# EAGLE board rev_B (EAGLE 9.2.2)
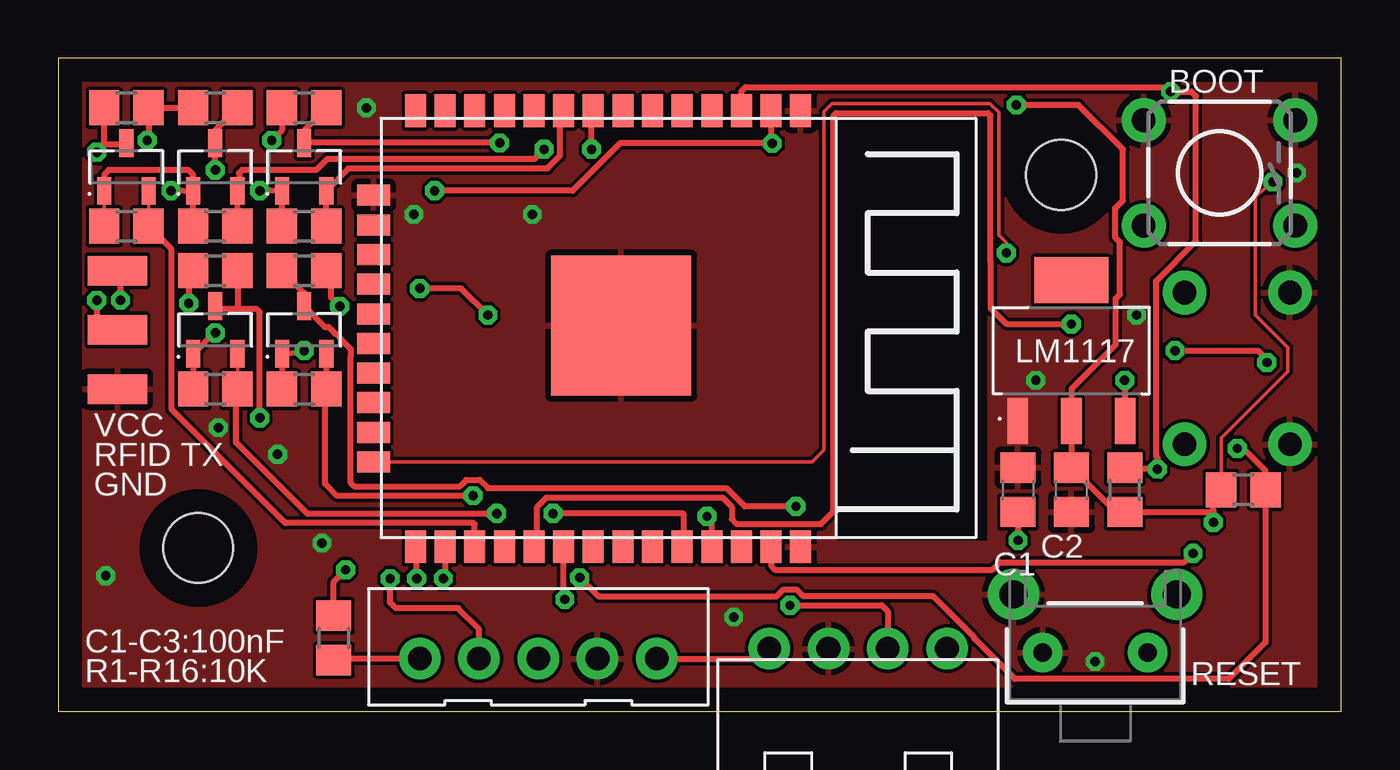
[diagram p0: board, top side]
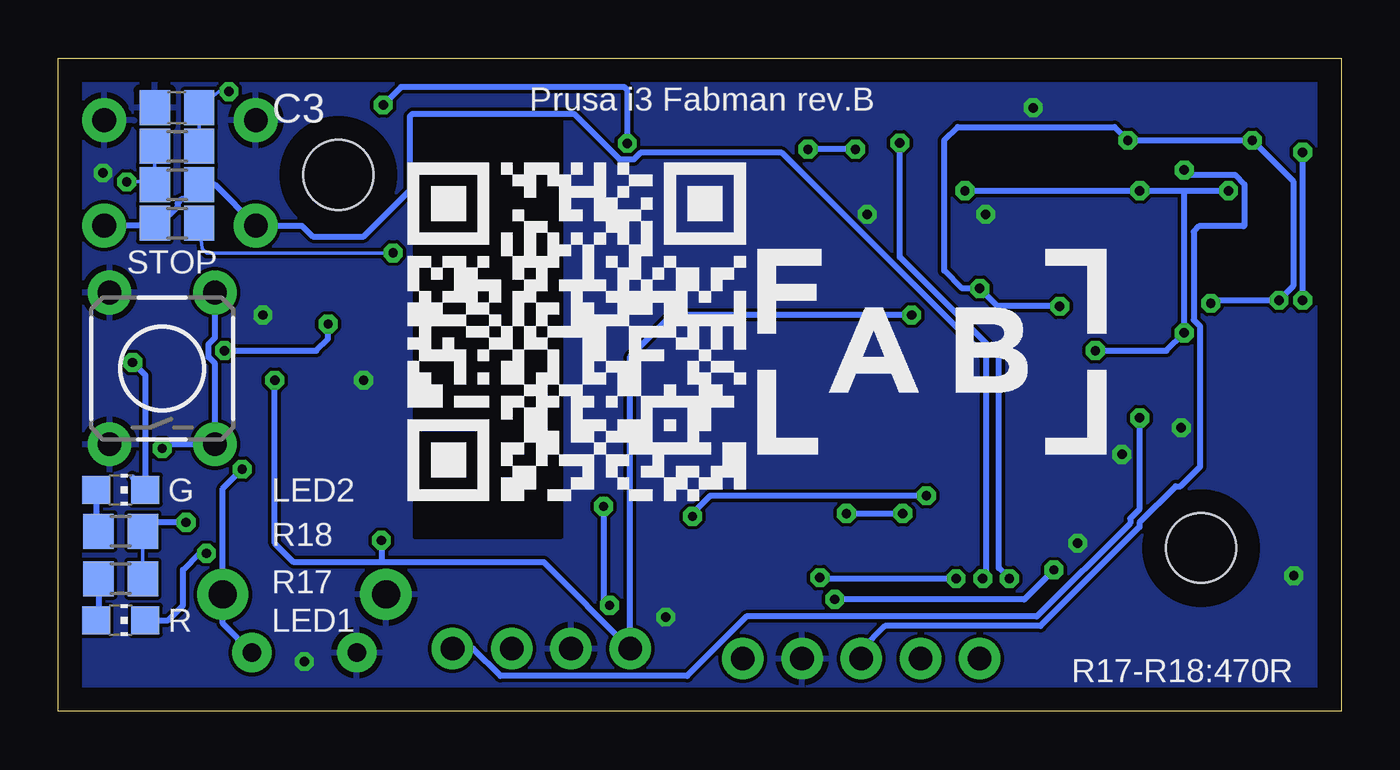
[diagram p1: board, bottom side, seen from below]

Size 55 x 28 mm. Coordinates in mm from the lower left corner, seen from the top.
Outline: 0,0 55,0 55,28 0,28 0,0
Copper layers (1*16): Top 0.035mm / dielectric 1.5mm / Bottom 0.035mm
Design rules "default": minimum track width 6mil, minimum drill 0.35mm, track to track 6mil, track to pad 6mil, pad to pad 6mil, via to via 6mil, smd to smd 6mil, copper to edge 40mil, drill to drill 6mil, minimum pad ring 10mil, minimum via ring 8mil, stop-mask expansion 4mil, vias tented up to drill 0mil, thermal gap 10mil
Holes 3 mm at 43,23 6,7

## Footprints (pad centres in the part's own frame; a part is rotated, then mirrored left to right if it is on the bottom)
TACTILE_SWICTH_THT = drill 1.016 pad 1.88: 1 -3.251,2.261; 2 3.251,2.261; 3 -3.251,-2.261; 4 3.251,-2.261
C0805 = smd 1.3 x 1.5: 1 -0.95,0; 2 0.95,0
HEADER_1X4_RIGHT_ANGLE = drill 1.016 pad 1.778: 1 -3.81,0; 2 -1.27,0; 3 1.27,0; 4 3.81,0
HEADER_1X5 = drill 1.016 pad 1.778: 1 -5.08,0; 2 -2.54,0; 3 0,0; 4 2.54,0; 5 5.08,0
CHIP-LED0805 = smd 1.2 x 1.2: A 0,-1.05; C 0,1.05
SOT229P700X180-4 = smd 1.965 x 0.889: 1 -3.023,2.3; 2 -3.023,0; 3 -3.023,-2.3 | smd 1.965 x 3.189: 4 3.023,0
SMD_PAD_1.27X2.54MM = smd 1.27 x 2.54: 1 0,0
SOT95P240X110-3 = smd 1.18 x 0.609: 1 -1.024,0.95; 2 -1.024,-0.95; 3 1.024,0
R0805 = smd 1.3 x 1.5: 1 -0.95,0; 2 0.95,0
TACTILE_SWITCH_RIGHT_ANGLE_THT = drill 0.8 pad 1.7: 1 2.25,0; 2 -2.25,0 | drill 1.2 pad 2.2: ANCHOR1 3.5,-2.5; ANCHOR2 -3.5,-2.5
ESP32_MODULE = smd 6 x 6: 0 0.026,-0.121 | smd 1.4 x 0.9: 1 -9.194,7.569; 2 -9.194,6.298; 3 -9.194,5.029; 4 -9.194,3.759; 5 -9.194,2.489; 6 -9.194,1.218; 7 -9.194,-0.051; 8 -9.194,-1.321; 9 -9.194,-2.591; 10 -9.194,-3.861; 11 -9.194,-5.131; 12 -9.194,-6.402; 13 -9.194,-7.671; 14 -9.194,-8.941; 25 9.507,-8.941; 26 9.507,-7.671; 27 9.507,-6.402; 28 9.507,-5.131; 29 9.507,-3.861; 30 9.507,-2.591; 31 9.507,-1.321; 32 9.507,-0.051; 33 9.507,1.218; 34 9.507,2.489; 35 9.507,3.759; 36 9.507,5.029; 37 9.507,6.298; 38 9.507,7.569 | smd 0.9 x 1.4: 15 -5.564,-10.742; 16 -4.293,-10.742; 17 -3.023,-10.742; 18 -1.754,-10.742; 19 -0.483,-10.742; 20 0.786,-10.742; 21 2.057,-10.742; 22 3.326,-10.742; 23 4.596,-10.742; 24 5.867,-10.742

## Placement (x,y rotation side)
BOOT  TACTILE_SWITCH_THT_  [TACTILE_SWICTH_THT]  49.78,23.08 180 top
C1  100nF  [C0805]  41.15,9.49 90 top
C2  100nF  [C0805]  43.43,9.49 270 top
C3  100nF  [C0805]  49.91,25.88 180 bottom
CN1  HEADER_1X4"  [HEADER_1X4_RIGHT_ANGLE]  34.29,2.68 0 top
CN2  HEADER_1X5  [HEADER_1X5]  20.57,2.25 180 top
LED1  RED  [CHIP-LED0805]  52.32,3.9 270 bottom
LED2  GREEN  [CHIP-LED0805]  52.32,9.49 270 bottom
LM1117  LM1117_  [SOT229P700X180-4]  43.43,15.46 90 top
PAD1  SMD_PAD_1.27X2.54MM  [SMD_PAD_1.27X2.54MM]  2.54,18.89 90 top
PAD2  SMD_PAD_1.27X2.54MM  [SMD_PAD_1.27X2.54MM]  2.54,13.81 90 top
PAD3  SMD_PAD_1.27X2.54MM  [SMD_PAD_1.27X2.54MM]  2.54,16.35 90 top
Q1  BSS138  [SOT95P240X110-3]  10.54,16.35 90 top
Q2  BSS138  [SOT95P240X110-3]  6.73,16.35 90 top
Q3  BSS138  [SOT95P240X110-3]  6.73,23.34 90 top
Q4  BSS138  [SOT95P240X110-3]  10.54,23.34 90 top
Q5  BSS138  [SOT95P240X110-3]  2.92,23.34 90 top
R1  10K  [R0805]  45.72,9.49 90 top
R2  10K  [R0805]  50.8,9.49 180 top
R3  10K  [R0805]  10.54,18.89 180 top
R4  10K  [R0805]  10.54,13.81 0 top
R5  10K  [R0805]  6.73,18.89 0 top
R6  10K  [R0805]  6.73,13.81 0 top
R7  10K  [R0805]  6.73,25.88 0 top
R8  10K  [R0805]  6.73,20.8 0 top
R9  10K  [R0805]  10.54,25.88 0 top
R10  10K  [R0805]  10.54,20.8 0 top
R11  10K  [R0805]  2.92,25.88 180 top
R12  10K  [R0805]  2.92,20.8 0 top
R13  10K  [R0805]  11.81,3.14 270 top
R14  10K  [R0805]  49.91,22.57 180 bottom
R15  10K  [R0805]  49.91,20.92 0 bottom
R16  10K  [R0805]  49.91,24.23 180 bottom
R17  470R  [R0805]  52.32,5.68 180 bottom
R18  470R  [R0805]  52.32,7.71 180 bottom
RESET  TACTILE_SWITCH_RIGHT_ANGLE_THT"  [TACTILE_SWITCH_RIGHT_ANGLE_THT]  44.45,2.51 180 top
STOP_BUTTON  TACTILE_SWITCH_LONG_THT_  [TACTILE_SWICTH_THT]  50.55,14.7 90 bottom
U$1  ESP32_MODULE"  [ESP32_MODULE]  24.26,16.56 270 top

## Library data of the parts
BOOT CN1 CN2 LM1117 PAD1-PAD3 Q1-Q5 RESET STOP_BUTTON U$1 = dronecz
C1-C3 = rcl; SPICEPREFIX: C
LED1 LED2 = led
R1-R18 = rcl; SPICEPREFIX: R

## Nets
3V3: C2.1 LM1117.2 Q1.1 Q2.1 Q3.1 Q4.1 Q5.1 R1.1 R2.2 R4.1 R6.1 R8.1 R10.1 R12.1 R14.2 R16.2 R17.1 R18.1 U$1.2
EN: C3.1 R1.2 R16.1 RESET.2 RESET.ANCHOR2 U$1.3
GND: BOOT.3 BOOT.4 C1.2 C2.2 C3.2 CN1.2 CN2.2 LM1117.1 PAD2.1 RESET.1 RESET.ANCHOR1 STOP_BUTTON.1 STOP_BUTTON.2 U$1.0 U$1.1 U$1.15 U$1.38
IO0: BOOT.1 BOOT.2 R14.1 R15.1 U$1.25
IO2: R15.2 U$1.24
IO4: R2.1 STOP_BUTTON.3 STOP_BUTTON.4 U$1.26
IO5: LED2.C U$1.29
IO22: U$1.36
IO23: LED1.C U$1.37
N$2: U$1.28
N$3: LED1.A R17.2
N$4: LED2.A R18.2
N$5: R13.1 U$1.30
PRINTER_RESET: CN2.5 R13.2
RFID_: Q5.2 R12.2 U$1.27
RFID_TX: PAD3.1 Q5.3 R11.2
RXD: CN1.3 Q1.3 R3.2
RXD3: Q3.2 R8.2 U$1.8
RXD_PC: Q1.2 R4.2 U$1.35
RXD_PRINTER: CN2.3 Q3.3 R7.2
TXD: CN1.4 Q2.3 R5.2
TXD3: Q4.2 R10.2 U$1.9
TXD_PC: Q2.2 R6.2 U$1.34
TXD_PRINTER: CN2.4 Q4.3 R9.2
VCC: C1.1 CN1.1 CN2.1 LM1117.3 PAD1.1 R3.1 R5.1 R7.1 R9.1 R11.1

## Tracks (layer width: path | path; a pad name or v marks a point on that pad's centre or on a via)
3V3  (via drill 0.4)
  Top 0.152: Q5.1 R12.1 | v52.07,22.7 51.31,22.07 51.31,16.99 52.7,15.59 52.7,14.57 49.85,11.72 R2.2
  Top 0.254: R10.1 Q4.1 8.65,22.34 v8.64,22.32 | R8.1 Q3.1 | R6.1 Q2.1 6.65,16.22 v6.73,16.22 | R4.1 Q1.1 10.43,15.35 v10.54,15.46 | 48.64,8.54 R1.1 45.33,8.54 C2.1 LM1117.2 43.43,13.81 45.34,15.72 45.34,17.7 45.51,17.87 45.51,20.12 45.31,20.32 45.31,21.58 45.64,21.91 45.64,24.09 43.74,26 v41.07,26 | 48.63,8.54 48.64,8.54 | U$1.2 30.55,24.4 v30.61,24.35 24.08,24.35 22.05,22.32 v16.13,22.32 | Q5.1 1.97,23.02 2.16,23.21 5.59,23.21 5.78,23.02 Q3.1 | v4.83,22.32 4.97,22.34 Q3.1 | v49.52,8.1 49.52,8.6 | 49.52,8.6 49.52,9.16 R2.2 | 49.52,8.6 49.46,8.54 48.64,8.54
  Bottom 0.152: R17.1 R18.1 | R16.2 R14.2 50.86,22.7 v52.07,22.7
  Bottom 0.254: v30.61,24.35 30.61,26.64 30.73,26.77 40.31,26.77 v41.07,26 | 6.73,22.32 v8.64,22.32 v16.13,22.32 | 6.73,22.32 v4.83,22.32 | 6.73,22.32 v6.73,16.22 7.49,15.46 v10.54,15.46 | v49.52,8.1 50.99,8.1 R18.1
EN  (via drill 0.4)
  Top 0.254: R1.2 45.78,10.38 v47.12,10.38 47.12,10.89 47.07,10.94 47.07,18.46 48.77,20.16 48.77,26.38 48.58,26.57 v47.69,26.57 47.5,26.77 29.46,26.77 29.29,26.59 U$1.3
  Bottom 0.152: v47.69,26.57 48.14,26.57 C3.1 R16.1
  Bottom 0.254: RESET.2 47.95,3.76 RESET.ANCHOR2 47.95,9.55 v47.12,10.38
GND  (via drill 0.4)
  other vias: 15.24,21.3 2.03,5.81 28.96,4.03 44.45,2.13 41.91,14.19 46.23,16.99 53.09,23.08 20.32,21.3 13.21,25.88 9.4,11.02 11.3,7.21 6.86,12.16
  pour Bottom: 0,28.16 -0.13,-0.03 54.99,-0.03 55.12,28.16
  pour Top: -0.13,28.16 -0.13,-0.03 55.12,-0.03 55.12,28.16
IO0  (via drill 0.4)
  Top 0.254: v15.37,5.68 15.37,7 U$1.25
  Bottom 0.254: v15.37,5.68 15.24,5.94 15.24,15.21 23.98,23.95 30.05,23.95 30.32,23.67 30.94,23.67 32.89,25.62 33.35,25.62 33.36,25.62 39.81,25.62 39.92,25.51 39.92,22.34 41.91,20.36 44.09,20.36 44.56,20.82 BOOT.2 48.28,22.57 R14.1 49.58,21.95 49.73,21.95 49.89,21.79 49.89,21.64 50.61,20.92 R15.1 50.96,20.82 BOOT.1
IO2  (via drill 0.4)
  Top 0.152: U$1.24 32.31,10.69 32.83,11.21 32.83,25.71 33.18,26.06 39.95,26.06 40.32,25.69 40.32,20.41 40.65,20.09 v40.65,19.65
  Bottom 0.152: v40.65,19.65 48.64,19.65 48.83,19.85 R15.2
IO4  (via drill 0.4)
  Top 0.254: 16.64,7.1 U$1.26 16.58,5.76 v16.51,5.68 | v50.55,11.27 50.8,11.27 51.75,10.32 R2.1 51.75,2.95 50.18,1.38 41.01,1.38 39.27,3.12 39.27,3.17 37.49,4.95 31.93,4.95 31.65,5.22 31.09,5.22 30.79,4.92 23.16,4.92 v22.35,5.73
  Bottom 0.254: v50.55,11.27 50.37,11.45 STOP_BUTTON.3 48.28,14.9 48.56,15.18 48.56,15.74 48.28,16.02 STOP_BUTTON.4 | v16.51,5.68 22.3,5.68 v22.35,5.73
IO5  (via drill 0.4)
  Top 0.254: v47.88,15.46 51.44,15.46 51.82,15.08 v51.82,14.95 | U$1.29 20.53,7.18 20.53,8.76 20.93,9.16 28.48,9.16 28.88,8.76 28.88,8.24 29.08,8.03 32.7,8.03 33.23,8.56 33.23,25.54 33.35,25.65 39.85,25.65 39.97,25.54 39.97,20.29 39.97,19.26 39.97,17.28 40.64,16.61 v43.43,16.61
  Bottom 0.254: 51.82,10.04 LED2.C 51.27,14.41 v51.82,14.95 | v47.88,15.46 43.94,15.46 43.43,15.97 v43.43,16.61
IO23  (via drill 0.4)
  Top 0.254: 30.61,7 U$1.37 30.55,6.24 30.73,6.06 40.05,6.06 40.38,6.39 48.27,6.39 v48.65,6.77
  Bottom 0.254: LED1.C 50.29,3.9 49.66,4.54 49.66,6.06 48.95,6.77 v48.65,6.77
N$3
  Bottom 0.254: R17.2 53.27,4 LED1.A
N$4
  Bottom 0.254: LED2.A 53.37,7.82 R18.2
N$5  (via drill 0.4)
  Top 0.254: R13.1 11.81,5.56 v12.32,6.06 | v21.72,4.79 21.66,4.85 U$1.30
  Bottom 0.254: v12.32,6.06 13.59,4.79 v21.72,4.79
PRINTER_RESET
  Top 0.254: CN2.5 11.87,2.25 R13.2
RFID_
  Top 0.152: Q5.2 R12.2
  Top 0.254: 17.78,6.98 U$1.27 17.86,8.02 17.8,8.07 9.73,8.07 4.85,12.95 4.85,19.82 R12.2
RFID_TX  (via drill 0.4)
  Top 0.254: 1.97,25.29 R11.2 1.97,24.29 | v1.65,23.97 1.97,24.29 | Q5.3 2.88,24.29 1.97,24.29 | v1.65,17.62 1.65,16.35 PAD3.1
  Bottom 0.254: v1.65,17.62 v1.65,23.97
RXD  (via drill 0.4)
  Top 0.254: 9.59,18.3 R3.2 10.54,17.94 Q1.3 11.41,16.48 11.59,16.48 11.87,16.2 11.91,16.2 12.07,16.03 12.07,15.99 12.54,15.53 12.54,15.21 12.54,9.79 12.68,9.64 17.22,9.64 17.5,9.92 18.06,9.92 18.42,9.57 28.64,9.57 29.43,8.78 v31.62,8.78 | v31.37,4.54 35.31,4.54 35.56,4.29 CN1.3
  Bottom 0.254: v31.62,8.78 31.62,4.79 v31.37,4.54
RXD3  (via drill 0.4)
  Top 0.254: R8.2 Q3.2 7.75,22.4 7.75,23.08 7.87,23.21 11.05,23.21 11.54,23.69 20.42,23.69 v20.83,24.1 | 22.99,25.7 U$1.8 22.86,25.68 v22.86,24.1
  Bottom 0.254: v20.83,24.1 v22.86,24.1
RXD_PC  (via drill 0.4)
  Top 0.254: Q1.2 R4.2 11.43,13.75 11.43,9.75 11.94,9.24 v17.78,9.24 | U$1.35 28.02,8.15 v27.81,8.35
  Bottom 0.254: v27.81,8.35 27.81,8.48 27.05,9.24 v17.78,9.24
RXD_PRINTER  (via drill 0.4)
  Top 0.254: R7.2 6.73,24.93 Q3.3 v6.73,23.21
  Bottom 0.254: v6.73,23.21 6.53,23 4.54,23 4.14,22.6 4.14,20.84 4.19,20.8 6.1,20.8 6.33,20.57 6.33,16.78 6.05,16.51 6.05,10.49 6.89,9.64 7.09,9.64 8.64,8.1 8.64,7.89 12.89,3.65 19.56,3.65 20.57,2.63 CN2.3
TXD  (via drill 0.4)
  Top 0.254: R5.2 7.68,18.3 | 7.68,18.61 R5.2 | v8.64,12.58 8.64,17.11 8.51,17.24 7.62,17.24 | 7.62,17.24 6.84,17.24 Q2.3 | R5.2 7.68,17.3 7.62,17.24
  Bottom 0.254: CN1.4 37.21,2.68 36.04,1.51 28.05,1.51 25.5,4.06 13.06,4.06 9.05,8.06 9.05,8.26 8.64,8.68 v8.64,12.58
TXD3
  Top 0.152: 21.72,25.7 U$1.9
  Top 0.254: R10.2 Q4.2 12.44,23.29 20.98,23.29 21.51,23.82 21.51,25.6 U$1.9
TXD_PC  (via drill 0.4)
  Top 0.152: Q2.2 R6.2
  Top 0.254: U$1.34 26.8,7.1 26.8,8.48 v21.21,8.48 | R6.2 7.62,13.75 7.62,11.53 10.67,8.48 v18.8,8.48
  Bottom 0.254: v21.21,8.48 v18.8,8.48
TXD_PRINTER  (via drill 0.4)
  Top 0.254: R9.2 10.54,24.93 Q4.3 10.58,24.37 v18.92,24.37 | CN2.4 18.03,3.52 17.14,4.41 14.48,4.41 14.22,4.67 v14.22,5.68
  Bottom 0.254: v18.92,24.37 18.92,19.47 14.68,15.23 14.68,6.14 v14.22,5.68
VCC  (via drill 0.4)
  Top 0.254: R7.1 R11.1 3.87,24.54 v3.81,24.48 | R3.1 11.68,18.89 11.68,17.75 v12.06,17.37 | 11.43,18.95 R3.1 | v45.72,14.19 45.72,12.55 LM1117.3 | C1.1 v41.15,7.32 | 11.56,18.82 R3.1 | PAD1.1 2.67,18.89 v2.67,17.62 | R9.1 9.59,24.93 v9.14,24.48 | CN2.1 30.05,2.25 CN1.1 | R5.1 5.59,18.7 v5.59,17.49 | v18.41,16.99 17.27,18.13 v15.49,18.13
  Bottom 0.254: v45.72,14.19 45.72,7.21 44.9,6.39 41.15,6.39 | v41.15,7.32 41.15,6.39 | 41.15,6.39 34.18,6.39 CN1.1 30.48,15.21 28.7,16.99 v18.41,16.99 | v5.59,17.49 5.46,17.62 v2.67,17.62 2.06,18.23 2.06,22.73 v3.81,24.48 v9.14,24.48 9.72,25.06 16.44,25.06 17.02,24.48 17.02,18.89 16.26,18.13 v15.49,18.13 14.73,17.37 v12.06,17.37

## Text on the board
bPlace: Prusa i3 Fabman rev.B | STOP | G | R | R17-R18:470R
tNames: VCC | RFID TX | GND | C1-C3:100nF | R1-R16:10K